# EAGLE board IC Final Board v29 (EAGLE 9.7.0)
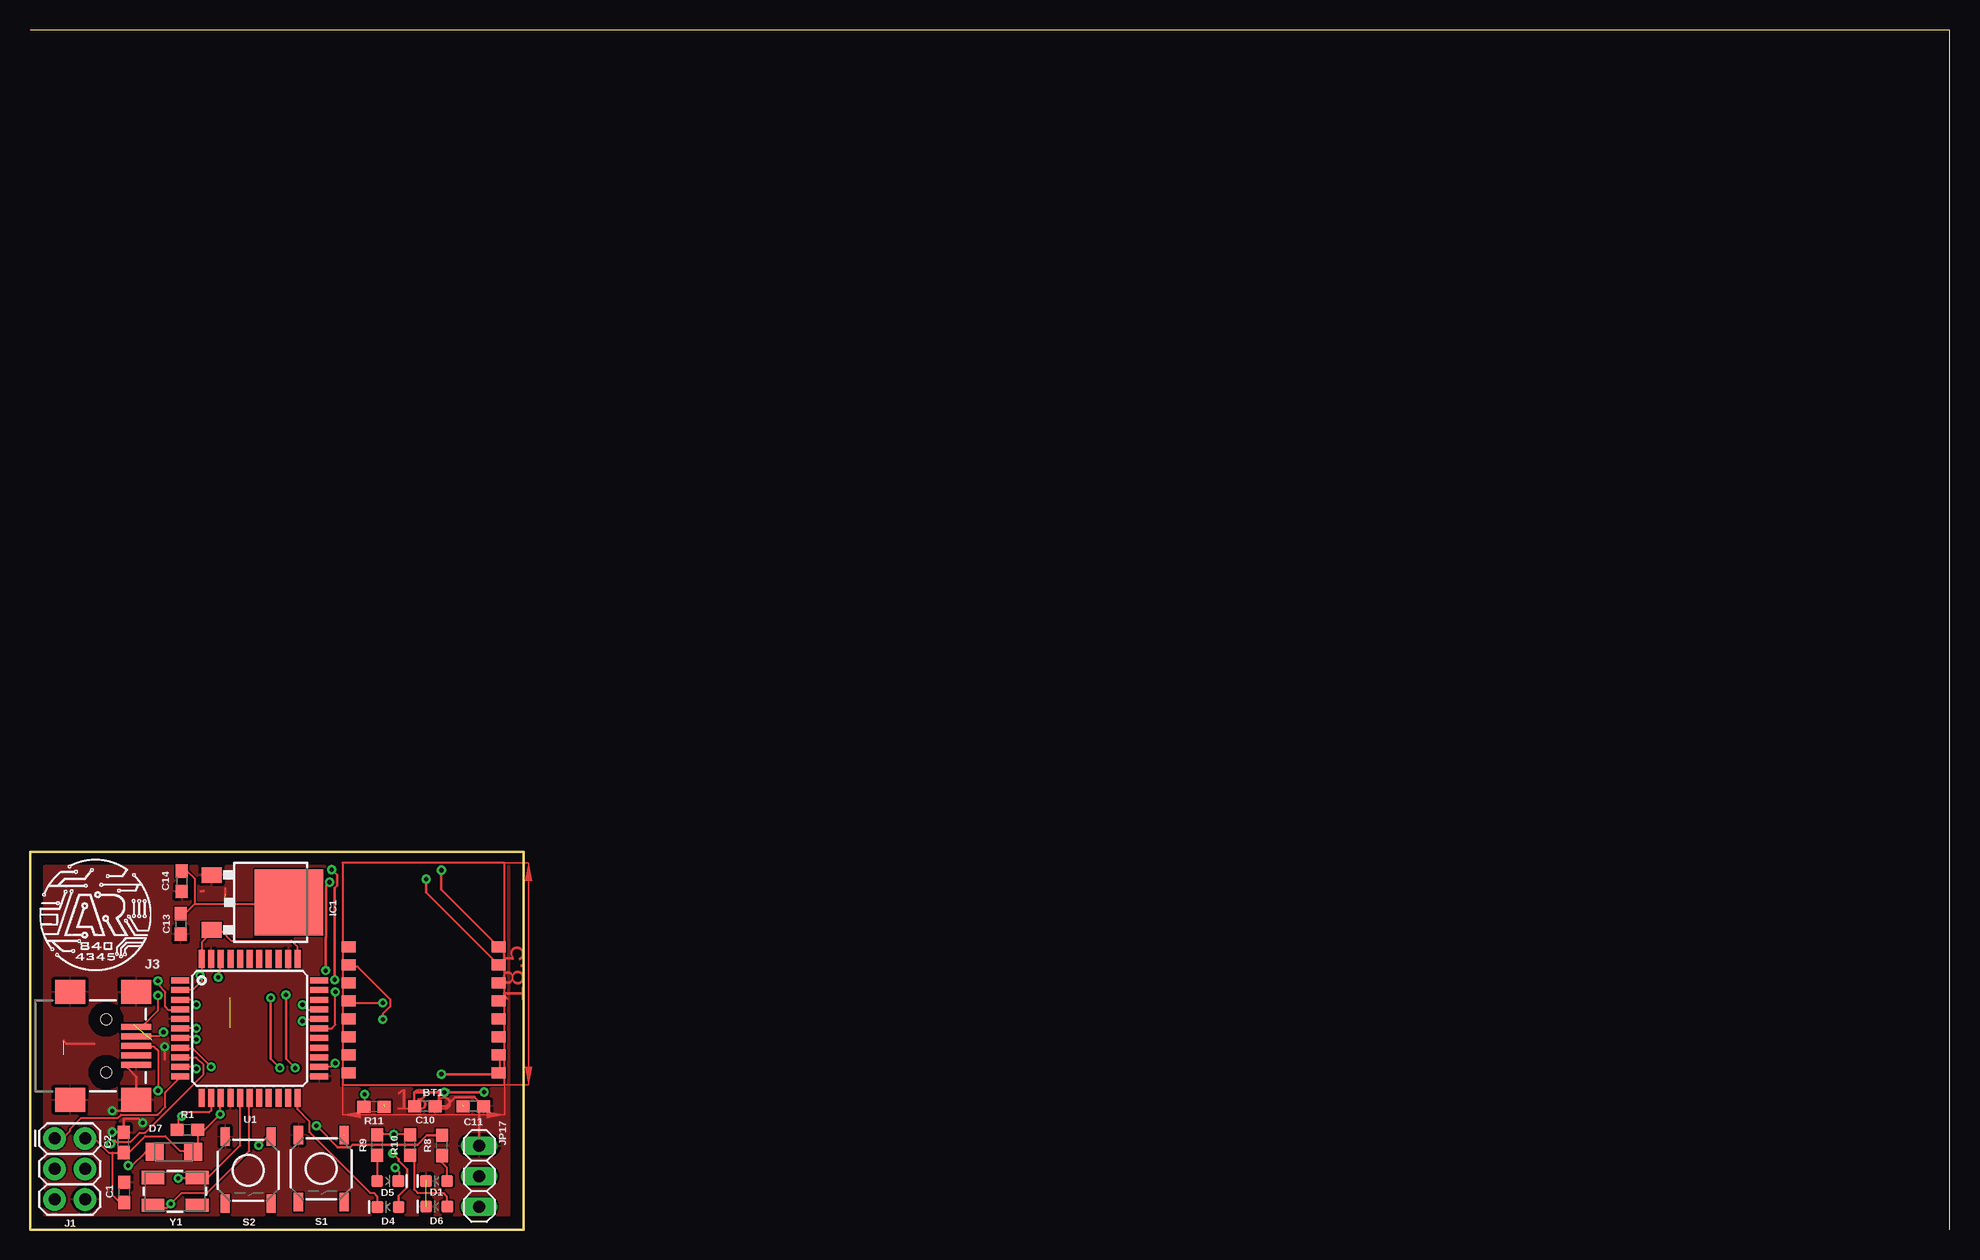
[diagram p0: board, top side]
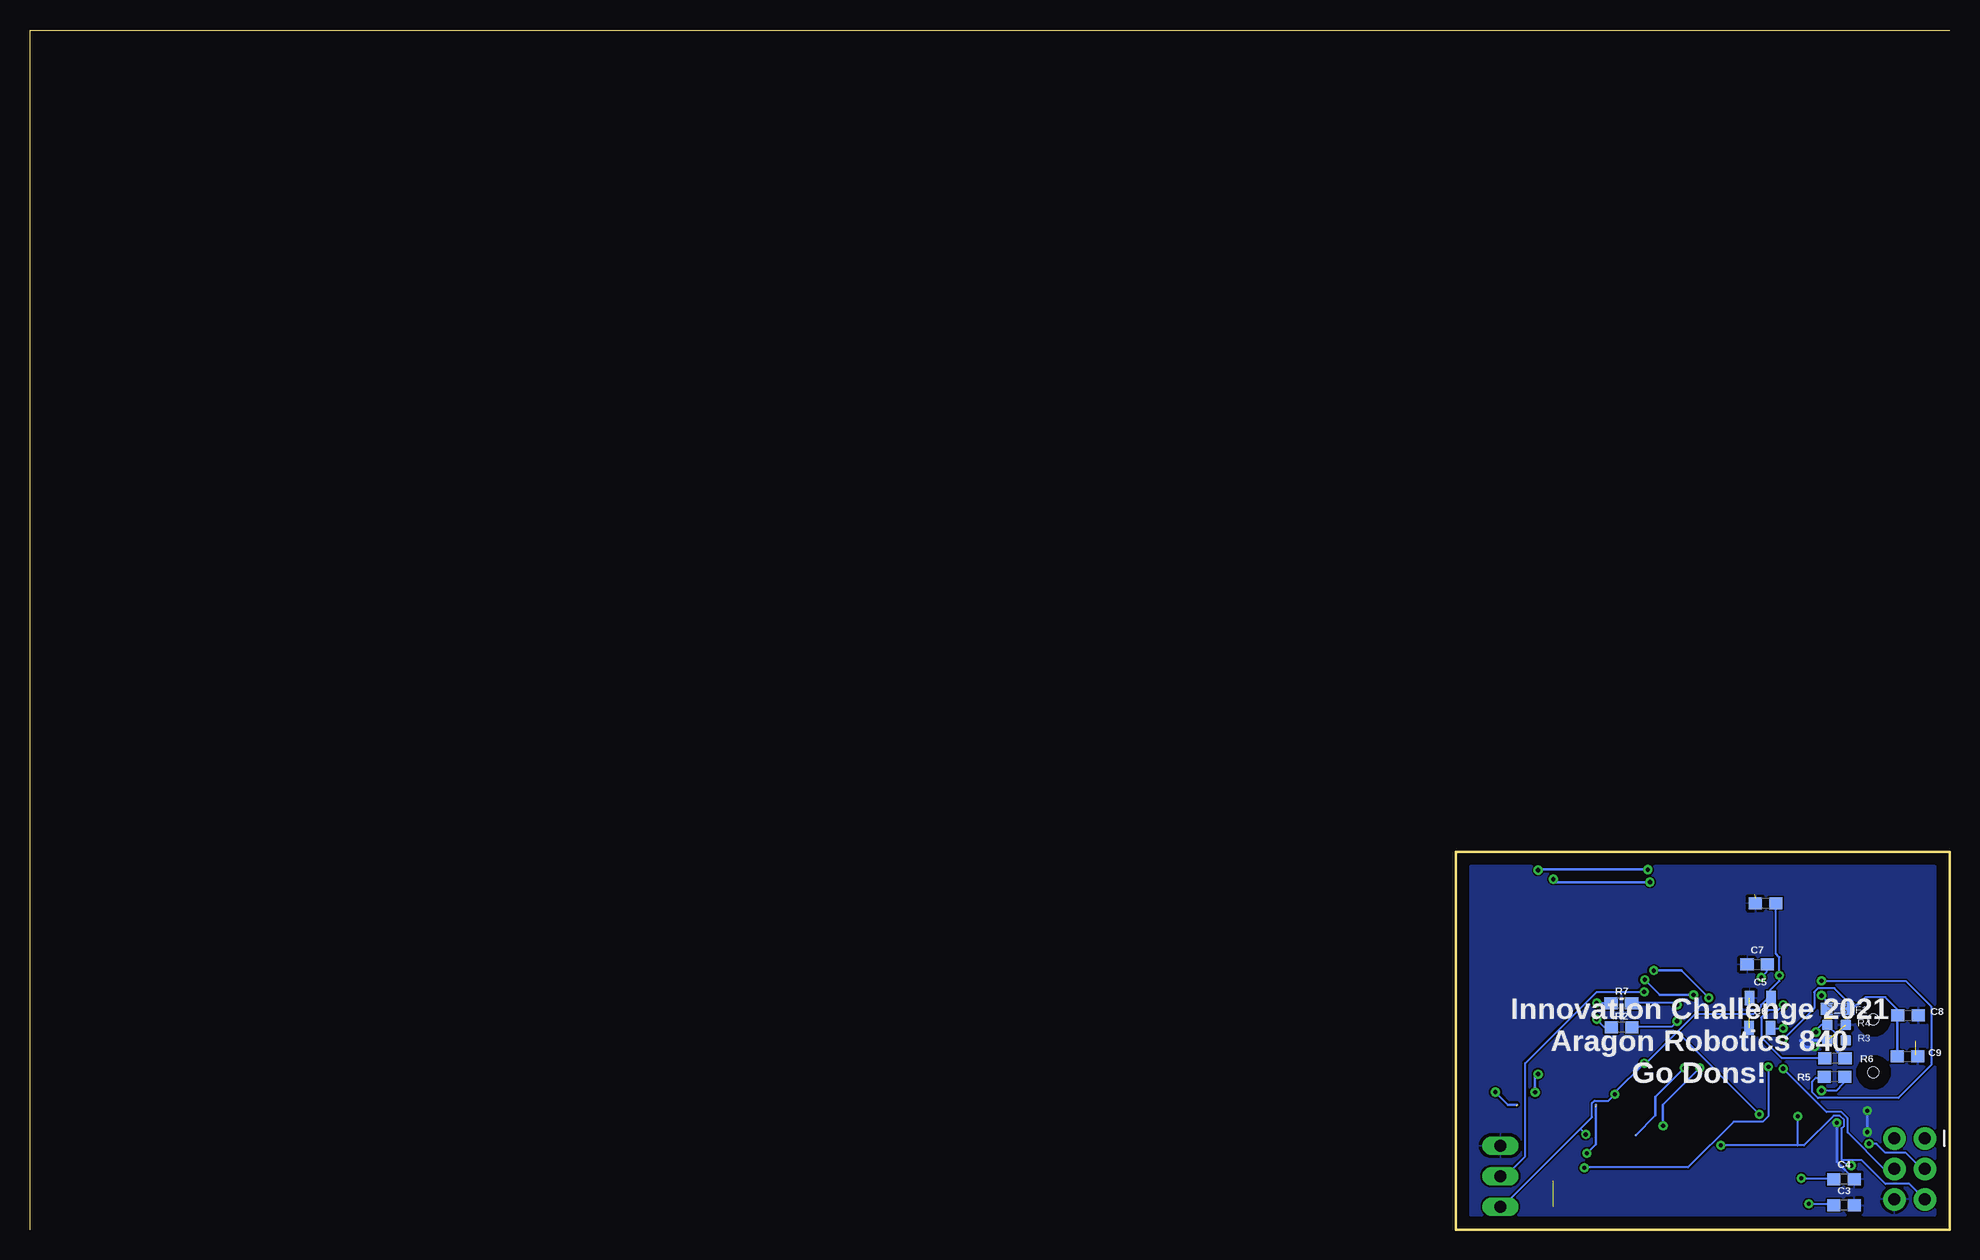
[diagram p1: board, bottom side, seen from below]

Size 160 x 100 mm. Coordinates in mm from the lower left corner, seen from the top.
Outline: 160,0 160,100 0,100
Outline: 0,31.5 41.15,31.5 41.15,0 0,0 0,31.5
Copper layers (1*16): Top 0.035mm / dielectric 1.5mm / Bottom 0.035mm
Design rules "default": minimum track width 6mil, minimum drill 0.35mm, track to track 6mil, track to pad 6mil, pad to pad 6mil, via to via 6mil, smd to smd 6mil, copper to edge 40mil, drill to drill 6mil, minimum pad ring 10mil, minimum via ring 8mil, stop-mask expansion 4mil, vias tented up to drill 0mil, thermal gap 10mil

## Footprints (pad centres in the part's own frame; a part is rotated, then mirrored left to right if it is on the bottom)
HM-19 = smd 1.2 x 0.9: GND 13,5.5; NC0 0.5,5.5; NC1 0.5,4; NC2 0.5,2.5; NC3 0.5,1; NC(VCC) 13,2.5; PIO0 13,11.5; PIO1 13,10; PIO2 13,8.5; PIO3 13,7; RESETB 13,4; UART_CTS 0.5,8.5; UART_RTS 0.5,11.5; UART_RX 0.5,7; UART_TX 0.5,10; VCC 13,1
0603 = smd 1.1 x 1: 1 -0.85,0; 2 0.85,0
0805 = smd 0.8 x 1.2: 1 -0.9,0; 2 0.9,0
LED-0603 = smd 1 x 1: A -0.877,0; C 0.877,0
LED-1206 = smd 1.5 x 1.5: + -1.6,0; - 1.6,0
0603L = smd 1 x 1: 1 -0.9,0; 2 0.9,0
TO252 = smd 1.3 x 1.7: 1 -2.285,-4.22; 2 2.285,-4.22 | smd 5.5 x 5.7: 3 0,2.22
2X3 = drill 1.016 pad 1.88: 1 0,0; 2 0,2.54; 3 2.54,0; 4 2.54,2.54; 5 5.08,0; 6 5.08,2.54
USB-MINIB = smd 2.5 x 0.5: D+ 2.5,0; D- 2.5,0.8; GND 2.5,-1.6; ID 2.5,-0.8; VBUS 2.5,1.6 | smd 2.5 x 2: S1 -3,4.5; S2 2.5,4.5; S3 -3,-4.5; S4 2.5,-4.5 | hole 0.9: 0,2.2; 0,-2.2
1X03 = drill 1.016 long: 1 -2.54,0; 2 0,0; 3 2.54,0
R0603 = smd 0.889 x 0.889: 1 0,0.762; 2 0,-0.762
TACTILE_SWITCH_SMD_5.2MM = smd 1.524 x 0.762: 1 -2.794,1.905; 2 2.794,1.905; 3 -2.794,-1.905; 4 2.794,-1.905
TQFP44 = smd 1.5 x 0.5: 1 -5.8,4; 2 -5.8,3.2; 3 -5.8,2.4; 4 -5.8,1.6; 5 -5.8,0.8; 6 -5.8,0; 7 -5.8,-0.8; 8 -5.8,-1.6; 9 -5.8,-2.4; 10 -5.8,-3.2; 11 -5.8,-4; 23 5.8,-4; 24 5.8,-3.2; 25 5.8,-2.4; 26 5.8,-1.6; 27 5.8,-0.8; 28 5.8,0; 29 5.8,0.8; 30 5.8,1.6; 31 5.8,2.4; 32 5.8,3.2; 33 5.8,4 | smd 0.5 x 1.5: 12 -4,-5.8; 13 -3.2,-5.8; 14 -2.4,-5.8; 15 -1.6,-5.8; 16 -0.8,-5.8; 17 0,-5.8; 18 0.8,-5.8; 19 1.6,-5.8; 20 2.4,-5.8; 21 3.2,-5.8; 22 4,-5.8; 34 4,5.8; 35 3.2,5.8; 36 2.4,5.8; 37 1.6,5.8; 38 0.8,5.8; 39 0,5.8; 40 -0.8,5.8; 41 -1.6,5.8; 42 -2.4,5.8; 43 -3.2,5.8; 44 -4,5.8
CRYSTAL-SMD-5X3.2-4PAD = smd 1.9 x 1.1: 1 -1.85,-1.15; 2 1.85,-1.15; 3 1.85,1.15; 4 -1.85,1.15

## Placement (x,y rotation side)
BT1  HM-19  [HM-19]  26.06,12.06 0 top
C1  0.1uF  [0603]  7.87,3.1 90 top
C2  0.1uF  [0603]  7.8,7.26 90 top
C3  18pF  [0603]  8.79,2.03 180 bottom
C4  18pF  [0603]  8.79,4.19 180 bottom
C5  1.0uF  [0805]  15.77,19.3 0 bottom
C6  1.0uF  [0805]  15.8,16.81 0 bottom
C7  0.1uF  [0603]  16.03,22.1 0 bottom
C8  0.1uF  [0603]  3.45,17.86 0 bottom
C9  10uF  [0603]  3.51,14.43 0 bottom
C10  0.1uF  [0603]  32.91,10.29 180 top
C11  10uF  [0603]  36.96,10.29 180 top
C12  10uF  [0603]  15.34,27.2 180 bottom
C13  0.1uF  [0603]  12.55,25.48 270 top
C14  22uF  [0603]  12.65,29.03 270 top
D1  WHITE  [LED-0603]  33.89,4.04 180 top
D4  TXYellow  [LED-0603]  29.85,1.89 180 top
D5  RXYellow  [LED-0603]  29.82,4.04 0 top
D6  ON GREEN  [LED-0603]  33.9,1.91 180 top
D7  SMD-DIODE-SWITCHING-75V-150MA(D1206)  [LED-1206]  12,6.49 0 top
F1  0603L050  [0603L]  9.35,18.41 180 bottom
IC1  LM1117DT-3.3  [TO252]  19.36,27.27 270 top
J1  AVR_SPI_PROG_3X2PTH  [2X3]  2.06,7.59 270 top
J3  USB_MINI-B_SMT  [USB-MINIB]  6.33,15.31 0 top
JP17  PINHD-1X3  [1X03]  37.45,4.45 270 top
R1  10  [0603]  13.13,8.33 0 top
R2  1k  [0603]  27.33,16.87 180 bottom
R3  VARISTOR-5V-28V(0603)  [R0603]  9.43,15.75 90 bottom
R4  VARISTOR-5V-28V(0603)  [R0603]  9.41,17.08 270 bottom
R5  22  [0603]  9.58,12.75 180 bottom
R6  22  [0603]  9.55,14.27 180 bottom
R7  1k  [0603]  27.36,18.87 180 bottom
R8  470  [0603]  34.34,7.01 90 top
R9  1k  [0603]  28.96,7.04 90 top
R10  1k  [0603]  31.7,7.04 90 top
R11  1k  [0603]  28.68,10.24 180 top
S1  MOMENTARY-SWITCH-SPST-SMD-5.2MM  [TACTILE_SWITCH_SMD_5.2MM]  24.28,5.08 270 top
S2  MOMENTARY-SWITCH-SPST-SMD-5.2MM  [TACTILE_SWITCH_SMD_5.2MM]  18.19,4.95 270 top
U1  32U4  [TQFP44]  18.31,16.76 0 top
Y1  16MHz  [CRYSTAL-SMD-5X3.2-4PAD]  12.1,3.18 180 top

## Library data of the parts
BT1 = HM-19 Bluetooth FINAL
C1 C2 C7 C8 C10 C13 = SparkFun-Capacitors; PROD_ID: CAP-00810
C3 C4 = SparkFun-Capacitors; PROD_ID: CAP-08267
C5 = SparkFun-Capacitors; PROD_ID: CAP-08064
C6 = SparkFun-Capacitors; PROD_ID: CAP-11625
C9 C11 C12 = SparkFun-Capacitors; PROD_ID: CAP-11015
C14 = SparkFun-Capacitors; PROD_ID: CAP-14464
D1 = SparkFun-LED; PROD_ID: DIO-09004
D4 D5 = SparkFun-LED; PROD_ID: DIO-09003
D6 = SparkFun-LED; PROD_ID: DIO-00821
D7 = SMD-DIODE-SWITCHING-75V-150MA_D1206_; AVAILABILITY: Warning; DESCRIPTION: Diode Standard 100V 150mA Surface Mount 1206; MF: Bourns; MP: CD1206-S01575; PACKAGE: 1206 Bourns; PRICE: None
F1 = polyfuse-smd_10; MF: Littelfuse; MPN: 0603L050; OC_FARNELL: 2125904; OC_NEWARK: 88T7683
IC1 = lm1117_10; MF: Texas Instruments; MPN: LM1117DT-3.3; OC_FARNELL: 1469048; OC_NEWARK: 41K3430
J1 = SparkFun-Connectors
J3 = SparkFun-Connectors; PROD_ID: CONN-08193; SF_ID: PRT-00587
JP17 = Connector; CATEGORY: CONNECTOR; SUB-CATEGORY: PIN-HEADER
R1 = SparkFun-Resistors; PROD_ID: RES-09834
R2 R7 R9-R11 = SparkFun-Resistors; PROD_ID: RES-07856
R3 R4 = SMD-RES-VARISTOR-5V-28V_0603_; AVAILABILITY: Good; DESCRIPTION: Varistor 1 Circuit Surface Mount, MLCV 0603 (1608 Metric); MF: Bourns; MP: CG0603MLC-05E; PACKAGE: 0603 Bourns Inc.; PRICE: None; PURCHASE-URL: https://pricing.snapeda.com/search/part/CG0603MLC-05E/?ref=eda
R5 R6 = SparkFun-Resistors; PROD_ID: RES-08698
R8 = SparkFun-Resistors; PROD_ID: RES-07869
S1 S2 = SparkFun-Switches; PROD_ID: SWCH-08247; SF_SKU: COM-08720
U1 = SparkFun-IC-Microcontroller; PROD_ID: IC-11161
Y1 = SparkFun-Clocks; PROD_ID: XTAL-08218; SF_ID: COM-00094

## Nets
3.3VREGULATOR: C13.1 C14.1 IC1.3
D9/RX: R2.1 U1.29
D10/TX: R7.1 U1.30
D+: J3.D+ R5.1
D-\: J3.D- R4.2 R6.1
GND: C1.2 C2.2 C3.1 C4.1 C5.1 C6.1 C7.1 C8.2 C9.2 C10.1 C11.1 C12.2 C13.2 C14.2 D1.C D6.C IC1.1 J1.6 J3.GND J3.S1 J3.S2 J3.S3 J3.S4 JP17.1 R3.1 R4.1 S1.3 S2.3 U1.5 U1.15 U1.23 U1.35 U1.43
IO8: JP17.2 U1.28
MISO: J1.1 U1.11
MOSI: J1.4 U1.10
N$1: R3.2
N$2: D7.+ J1.5 R1.1 S2.1 U1.13
N$3: BT1.UART_TX R2.2
N$4: BT1.UART_RX R7.2
N$5: C7.2 U1.42
N$6: C6.2 U1.6
N$7: BT1.PIO0 S1.1
N$8: BT1.PIO1 R8.2
N$9: D1.A R8.1
N$10: D4.A R11.1
N$11: D5.A R9.1
N$12: D6.A R10.1
N$13: F1.2 J3.VBUS
N$15: BT1.NC(VCC) BT1.VCC C10.2 C11.2
RD+: R5.2 U1.4
RD-: R6.2 U1.3
RXLED: D5.C U1.8
SCK: J1.3 U1.9
TXLED: D4.C U1.22
VCC: C1.1 C2.1 C5.2 C12.1 D7.- IC1.2 J1.2 JP17.3 R1.2 R9.2 R10.2 R11.2 U1.2 U1.14 U1.24 U1.34 U1.44
VUSB: C8.1 C9.1 F1.1 U1.7
XTAL1: C3.2 U1.17 Y1.3
XTAL2: C4.2 U1.16 Y1.1

## Tracks (layer width: path | path; a pad name or v marks a point on that pad's centre or on a via)
3.3VREGULATOR
  Top 0.152: 13.72,27.13 12.95,26.36 12.65,26.36 C13.1 | 13.72,27.13 13.72,29.26 13.11,29.87 C14.1 | 13.72,27.13 21.49,27.13 IC1.3
D9/RX  (via drill 0.35)
  Top 0.152: v22.71,17.37 22.86,17.37 23.01,17.53 24.08,17.53 U1.29
  Bottom 0.152: v22.71,17.37 23.16,16.92 26.36,16.92 R2.1
D10/TX  (via drill 0.35)
  Top 0.152: v22.71,18.75 23.16,18.29 24.08,18.29 U1.30
  Bottom 0.152: v22.71,18.75 22.86,18.9 26.36,18.9 R7.1
D+  (via drill 0.35)
  Top 0.152: v10.67,11.58 10.67,14.94 10.36,15.24 8.84,15.24 J3.D+
  Bottom 0.152: v10.67,11.58 9.45,11.58 8.84,12.19 8.84,12.65 R5.1
D-\  (via drill 0.35)
  Top 0.152: v11.12,16.46 10.82,16.15 8.84,16.15 J3.D-
  Bottom 0.152: R6.1 8.84,14.33 9.45,14.94 9.45,16.31 10.06,16.92 10.06,17.07 R4.2 10.21,17.07 10.67,17.07 11.12,16.61 v11.12,16.46
GND  (via drill 0.35)  (5 unrouted)
  Top 0.152: C11.1 37.8,10.36
  Top 0.203: JP17.1 37.45,9.92 C11.1 37.05,11.04 35.45,11.04 34.7,10.29 C10.1 | 16.26,28.44 16.26,27.94 | IC1.1 15.14,29.11 | 14.22,28.19 14.44,28.19 14.48,28.23 | v11.23,15.24 11.23,14.17 | J3.GND 8.38,13.71 8.13,13.46 8.89,12.7 8.83,12.64 J3.S4 7.93,9.91 v6.86,9.91 | v6.86,8.13 7.78,8.13 C2.2 7.8,9.17 7.87,9.25 9.04,9.25 v9.4,8.89 | 5.33,15.49 3.05,15.49 2.79,15.75
  Bottom 0.152: JP17.1 37.49,7.01
  Bottom 0.203: 16.19,27.62 C12.2 | v11.23,15.24 11.94,15.24 12.45,15.75 12.44,15.75 R3.1 | v6.86,9.91 v6.86,8.13 | v9.4,8.89 9.4,5.65 C4.1 | 2.79,14.57 C9.2
  pour Top: 0.25,31.24 40.89,31.24 40.89,0.25 0.25,0.25
  pour Bottom: 0.25,31.24 40.89,31.24 40.89,0.25 0.25,0.25
IO8  (via drill 0.35)
  Top 0.152: U1.28 25.15,16.76 25.45,17.07 v25.45,19.81
  Bottom 0.152: v25.45,19.81 29.41,19.81 35.36,13.87 35.36,6.1 36.88,4.57 37.34,4.57 JP17.2
MISO
  Top 0.152: U1.11 12.5,12.65 11.28,11.43 11.28,10.21 10.64,9.58 7.58,9.58 7.3,9.3 4.27,9.3 3.35,8.38 3.35,8.23 2.74,7.62 2.13,7.62 J1.1
MOSI  (via drill 0.35)
  Top 0.152: v13.87,13.41 13.72,13.56 12.65,13.56 U1.10
  Bottom 0.152: J1.4 4.72,5.03 5.43,5.03 8.49,8.09 8.49,9.27 9.02,9.8 10.26,9.8 v13.87,13.41
N$2  (via drill 0.35)
  Top 0.152: R1.1 12.34,8.38 12.34,9.14 v12.65,9.45 12.95,9.75 14.94,9.75 15.09,9.91 15.09,10.82 U1.13 | D7.+ 10.36,6.4 9.6,6.4 8.53,5.33 v8.19,5.33 | v19.05,7.01 19.66,7.62 19.96,7.62 S2.1
  Bottom 0.152: 8.99,5.79 7.32,5.79 5.33,3.81 3.35,3.81 J1.5 | 12.65,7.01 v19.05,7.01 | 12.65,7.01 v12.65,9.45 | 8.99,5.79 8.53,5.33 v8.19,5.33 | 8.99,5.79 8.99,8.44 8.79,8.64 8.79,9.14 9.15,9.5 9.65,9.5 12.14,7.01 12.65,7.01
N$3  (via drill 0.35)
  Top 0.152: v29.41,17.53 29.41,17.98 30.02,18.59 30.02,19.2 27.28,21.95 26.67,21.95 BT1.UART_TX
  Bottom 0.152: v29.41,17.53 28.8,16.92 28.19,16.92 R2.2
N$4  (via drill 0.35)
  Top 0.152: v29.41,18.9 26.82,18.9 26.67,19.05 BT1.UART_RX
  Bottom 0.152: v29.41,18.9 28.35,18.9 R7.2
N$5  (via drill 0.35)
  Top 0.152: v15.7,21.03 15.7,21.34 15.85,21.49 15.85,22.55 U1.42
  Bottom 0.152: v15.7,21.03 15.24,21.49 15.24,22.1 C7.2
N$6  (via drill 0.35)
  Top 0.152: v13.87,16.76 U1.6
  Bottom 0.152: v13.87,16.76 14.78,16.76 C6.2
N$7  (via drill 0.35)  (1 unrouted)
  Top 0.203: BT1.PIO0 34.29,28.34 v34.29,29.96 | v21.34,19.56 21.34,14.22 v22.1,13.46 | v25.4,20.83 25.4,28.5 25.6,28.69 25.6,29.55 v25.15,30
  Bottom 0.203: v34.29,29.96 34.25,30 v25.15,30 | v25.4,20.83 24.13,19.56 v21.34,19.56 | v22.1,13.46 24.51,11.05 24.51,9.53 26.16,7.87
N$8  (via drill 0.35)
  Top 0.203: BT1.PIO1 33.02,28.11 v33.02,29.21 | v24.96,28.96 24.69,28.68 24.69,24.41 24.64,24.36 v24.64,21.59 | v20.07,19.3 20.07,14.22 v20.83,13.46 | R8.2 33.08,7.86 32.3,7.08 26.9,7.08 26.67,6.86 25.65,6.86 v23.88,8.64
  Bottom 0.203: v33.02,29.21 32.77,28.96 v24.96,28.96 | v24.64,21.59 22.35,21.59 v20.07,19.3 | v20.83,13.46 23.88,10.41 v23.88,8.64
N$9
  Top 0.152: D1.A 34.75,4.12 34.75,5.18 34.29,5.64 34.29,6.1 R8.1
N$10  (via drill 0.35)  (1 unrouted)
  Top 0.203: v30.23,6.35 30.73,5.85 30.73,5.75 31.45,5.03 31.45,3.52 30.73,2.81 D4.A
  Bottom 0.203: v30.23,6.35 29.46,7.11 29.46,10.41
N$11
  Top 0.152: R9.1 28.96,4.12 D5.A
N$12
  Top 0.152: D6.A 34.75,1.98 34.75,2.74 34.44,3.05 32.31,3.05 32,3.35 32,5.79 31.7,6.1 R10.1
N$13  (via drill 0.35)
  Top 0.152: v10.67,19.51 10.67,18.29 9.3,16.92 J3.VBUS
  Bottom 0.152: v10.67,19.51 10.36,19.2 10.36,18.44 F1.2
N$15  (via drill 0.35)  (1 unrouted)
  Top 0.152: BT1.VCC 39.17,13.11 39.17,14.48 BT1.NC(VCC)
  Top 0.203: BT1.VCC 38.95,12.95 v34.29,12.95 | C10.2 32,10.34 32,11.43 v34.54,11.43 37.59,11.43 37.62,11.46 v37.85,11.46
  Bottom 0.203: v34.29,12.95 34.54,12.7 v34.54,11.43 | v37.85,11.46 36.8,10.41 36.07,10.41
RD+  (via drill 0.35)
  Top 0.152: v10.67,20.73 10.67,20.42 11.28,19.81 11.28,18.59 11.58,18.29 12.5,18.29 U1.4
  Bottom 0.152: v10.67,20.73 3.66,20.73 1.52,18.59 1.52,13.72 4.27,10.97 10.97,10.97 11.43,11.43 11.43,12.34 11.12,12.65 10.52,12.65 R5.2
RD-  (via drill 0.35)
  Top 0.152: v13.87,18.75 13.41,19.2 12.65,19.2 U1.3
  Bottom 0.152: v13.87,18.75 14.33,18.29 15.09,18.29 15.7,17.68 15.7,16 14.02,14.33 10.52,14.33 R6.2
RXLED  (via drill 0.35)
  Top 0.152: v15.09,13.56 13.56,15.09 12.65,15.09 U1.8 | D5.C 30.79,4.12 30.79,4.8 v30.44,5.14
  Bottom 0.152: v15.09,13.56 15.09,9.45 15.54,8.99 17.98,8.99 21.79,5.18 30.4,5.18 v30.44,5.14
SCK  (via drill 0.35)
  Top 0.152: v6.71,7.16 7.01,7.47 7.16,7.32 8.38,7.32 9.14,8.08 9.6,8.08 14.48,12.95 14.48,13.72 13.87,14.33 12.65,14.33 U1.9
  Bottom 0.152: v6.71,7.16 6.1,7.16 5.33,6.4 3.66,6.4 2.44,5.18 2.13,5.18 J1.3
TXLED
  Top 0.152: D4.C 28.96,1.98 28.96,2.74 28.65,3.05 28.35,3.05 23.27,8.12 23.27,9.04 22.25,10.06 22.25,10.82 U1.22
VCC  (via drill 0.35)
  Top 0.152: 14.02,8.23 14.02,6.86 13.72,6.55 D7.- 13.56,6.55 12.5,6.55 11.28,7.77 9.6,7.77 8.23,6.4 7.92,6.4 C2.1 7.77,6.4 6.86,6.4 | 14.02,8.23 14.48,8.23 v15.85,9.6 15.85,10.82 U1.14 | 14.02,8.23 R1.2 | 6.86,6.4 6.55,6.4 5.49,7.47 4.72,7.47 J1.2 | 6.86,6.4 6.86,2.9 7.47,2.29 7.77,2.29 C1.1 | 14.33,21.18 14.33,22.55 U1.44 14.33,22.71 14.33,23.93 15.24,24.84 | 14.33,21.18 14.33,20.73 13.56,19.96 12.65,19.96 U1.2 | 15.24,24.84 16,24.84 16.76,24.08 21.79,24.08 22.25,23.62 22.25,22.71 U1.34 | 15.24,24.84 IC1.2 | 14.33,21.18 v14.17,21.18 | R9.2 28.96,7.92 v30.33,7.92 31.7,7.92 R10.2 | v27.89,11.28 27.89,10.36 R11.2 | v25.45,13.87 25.15,13.56 24.23,13.56 U1.24
  Bottom 0.152: C12.1 14.48,27.13 14.48,23.01 14.17,22.71 v14.17,21.18 14.17,20.73 14.94,19.96 14.94,19.36 C5.2 14.94,19.2 15.24,19.2 15.7,18.75 15.7,18.59 16.31,17.98 21.18,17.98 22.71,16.46 | 30.79,8.38 37.34,1.83 JP17.3 | 30.79,8.38 v30.33,7.92 | 22.71,16.46 25.3,13.87 v25.45,13.87 27.89,11.43 v27.89,11.28 28.42,10.74 29.6,10.74 29.79,10.55 29.79,9.37 30.79,8.38 | 22.71,16.46 v15.85,9.6
VUSB  (via drill 0.35)
  Top 0.152: v13.87,15.85 13.72,16 12.65,16 U1.7
  Bottom 0.152: 8.38,18.44 8.08,18.44 7.77,18.75 7.62,18.75 7.01,19.36 5.33,19.36 4.27,18.29 4.27,17.98 C8.1 4.42,17.83 | 4.42,14.48 C9.1 | v13.87,15.85 11.28,18.44 11.28,19.81 10.97,20.12 9.6,20.12 8.38,18.9 8.38,18.44 | 8.38,18.44 F1.1
  Bottom 0.203: C8.1 4.36,17.8 C9.1
XTAL1  (via drill 0.35)
  Top 0.152: Y1.3 10.36,1.98 10.52,1.83 11.43,1.83 v11.73,2.13 12.65,3.05 14.78,3.05 18.29,6.55 18.29,10.82 U1.17
  Bottom 0.152: v11.73,2.13 9.75,2.13 C3.2
XTAL2  (via drill 0.35)
  Top 0.152: v12.34,4.27 13.87,4.27 Y1.1 14.02,4.42 14.94,4.42 17.53,7.01 17.53,10.82 U1.16
  Bottom 0.152: v12.34,4.27 9.75,4.27 C4.2

## Text on the board
bNames: Innovation Challenge 2021 / Aragon Robotics 840 / Go Dons!